# Altium PCB DAC.PcbDoc
Units mil, origin at the board's own origin, x right, y up, seen from the top; angles counter-clockwise.
Board outline 4142.98 x 3908 mil, 2 copper layers (Top Layer, Bottom Layer); 119 components, 77 nets, 441 pads, 85 vias.
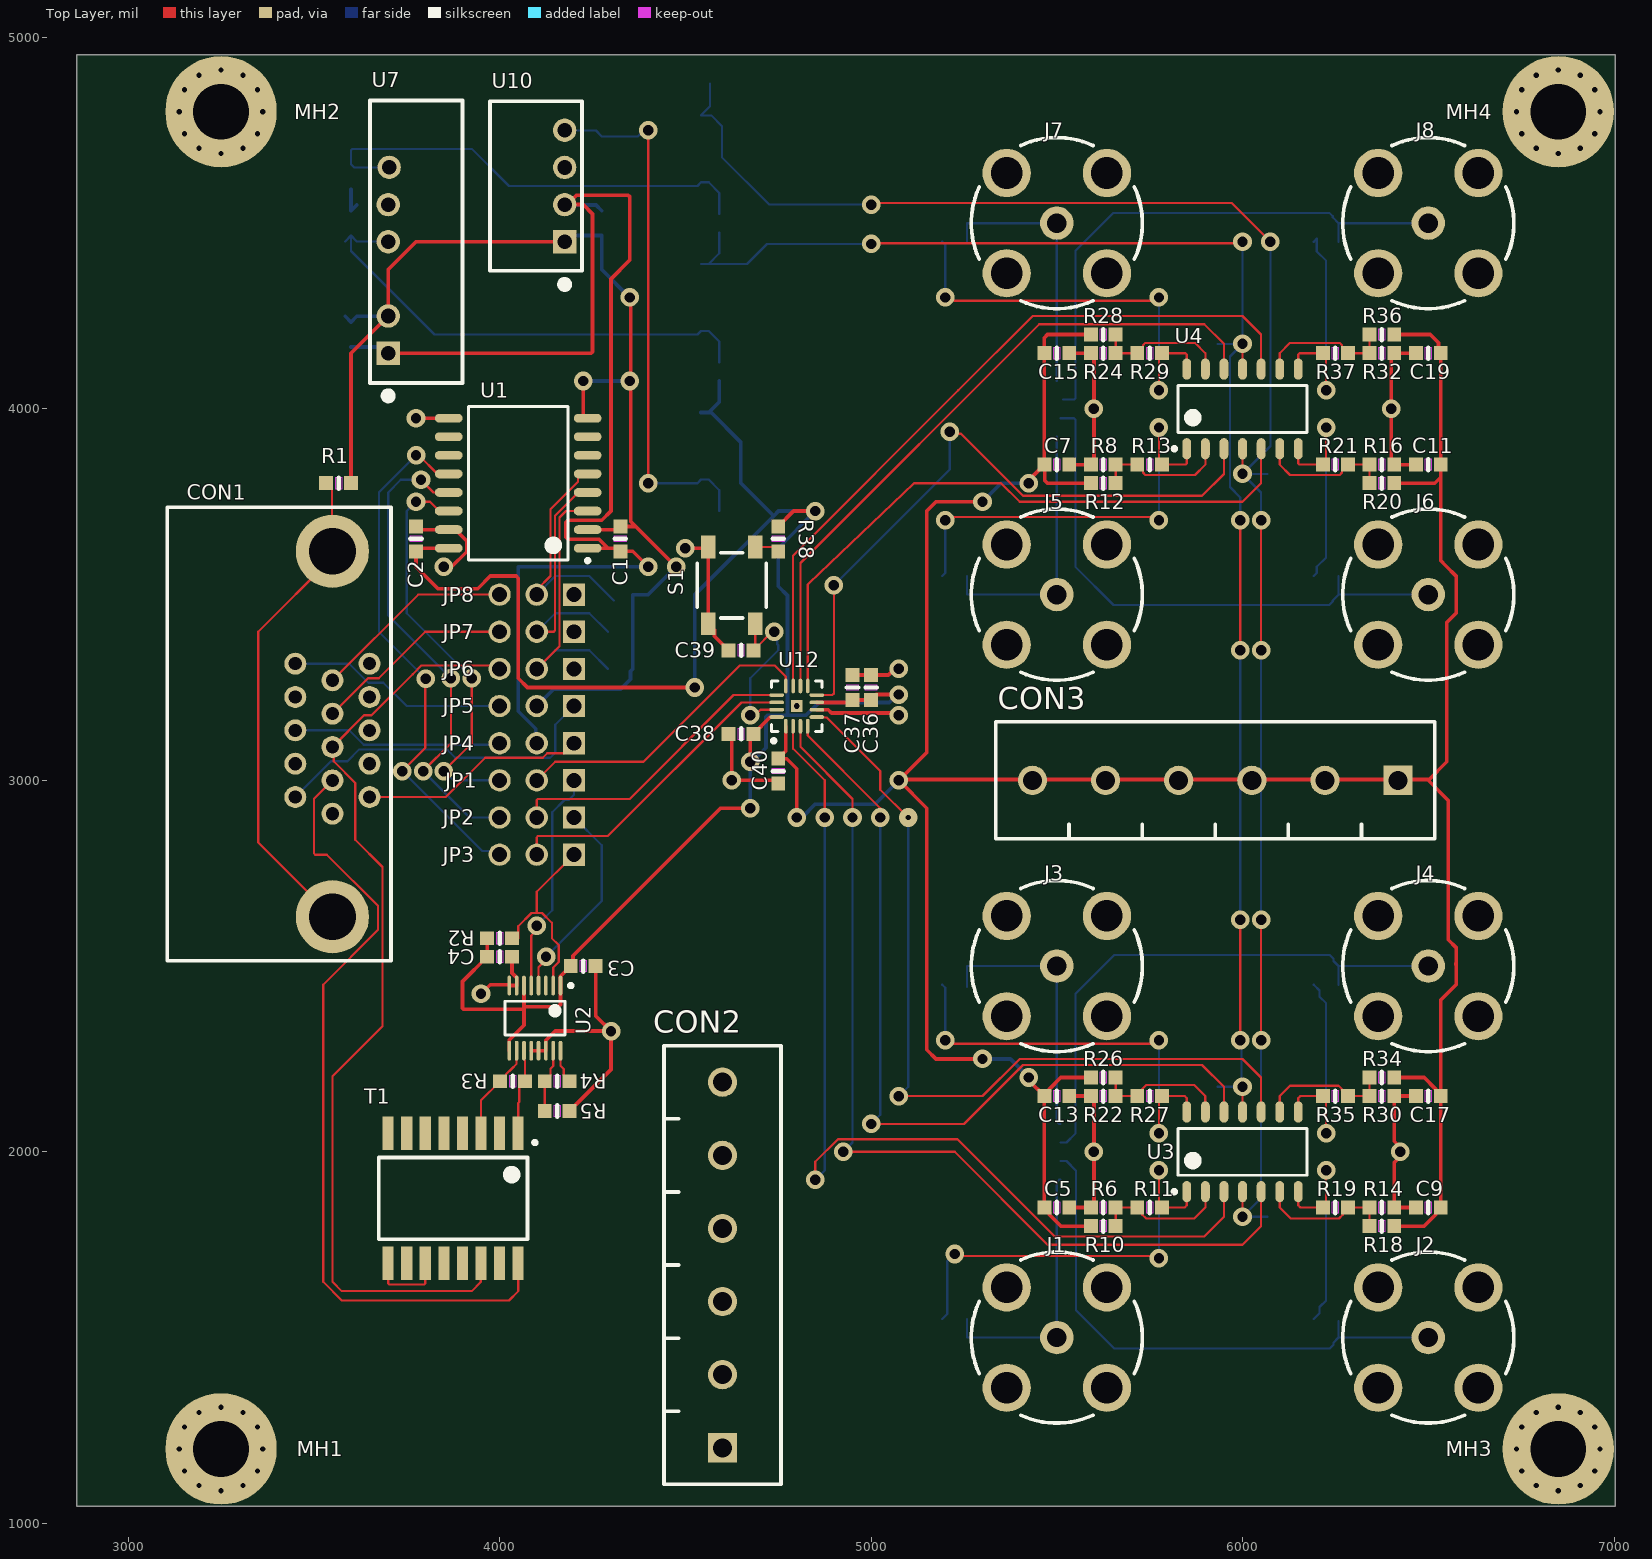
[diagram p0: Top Layer view]
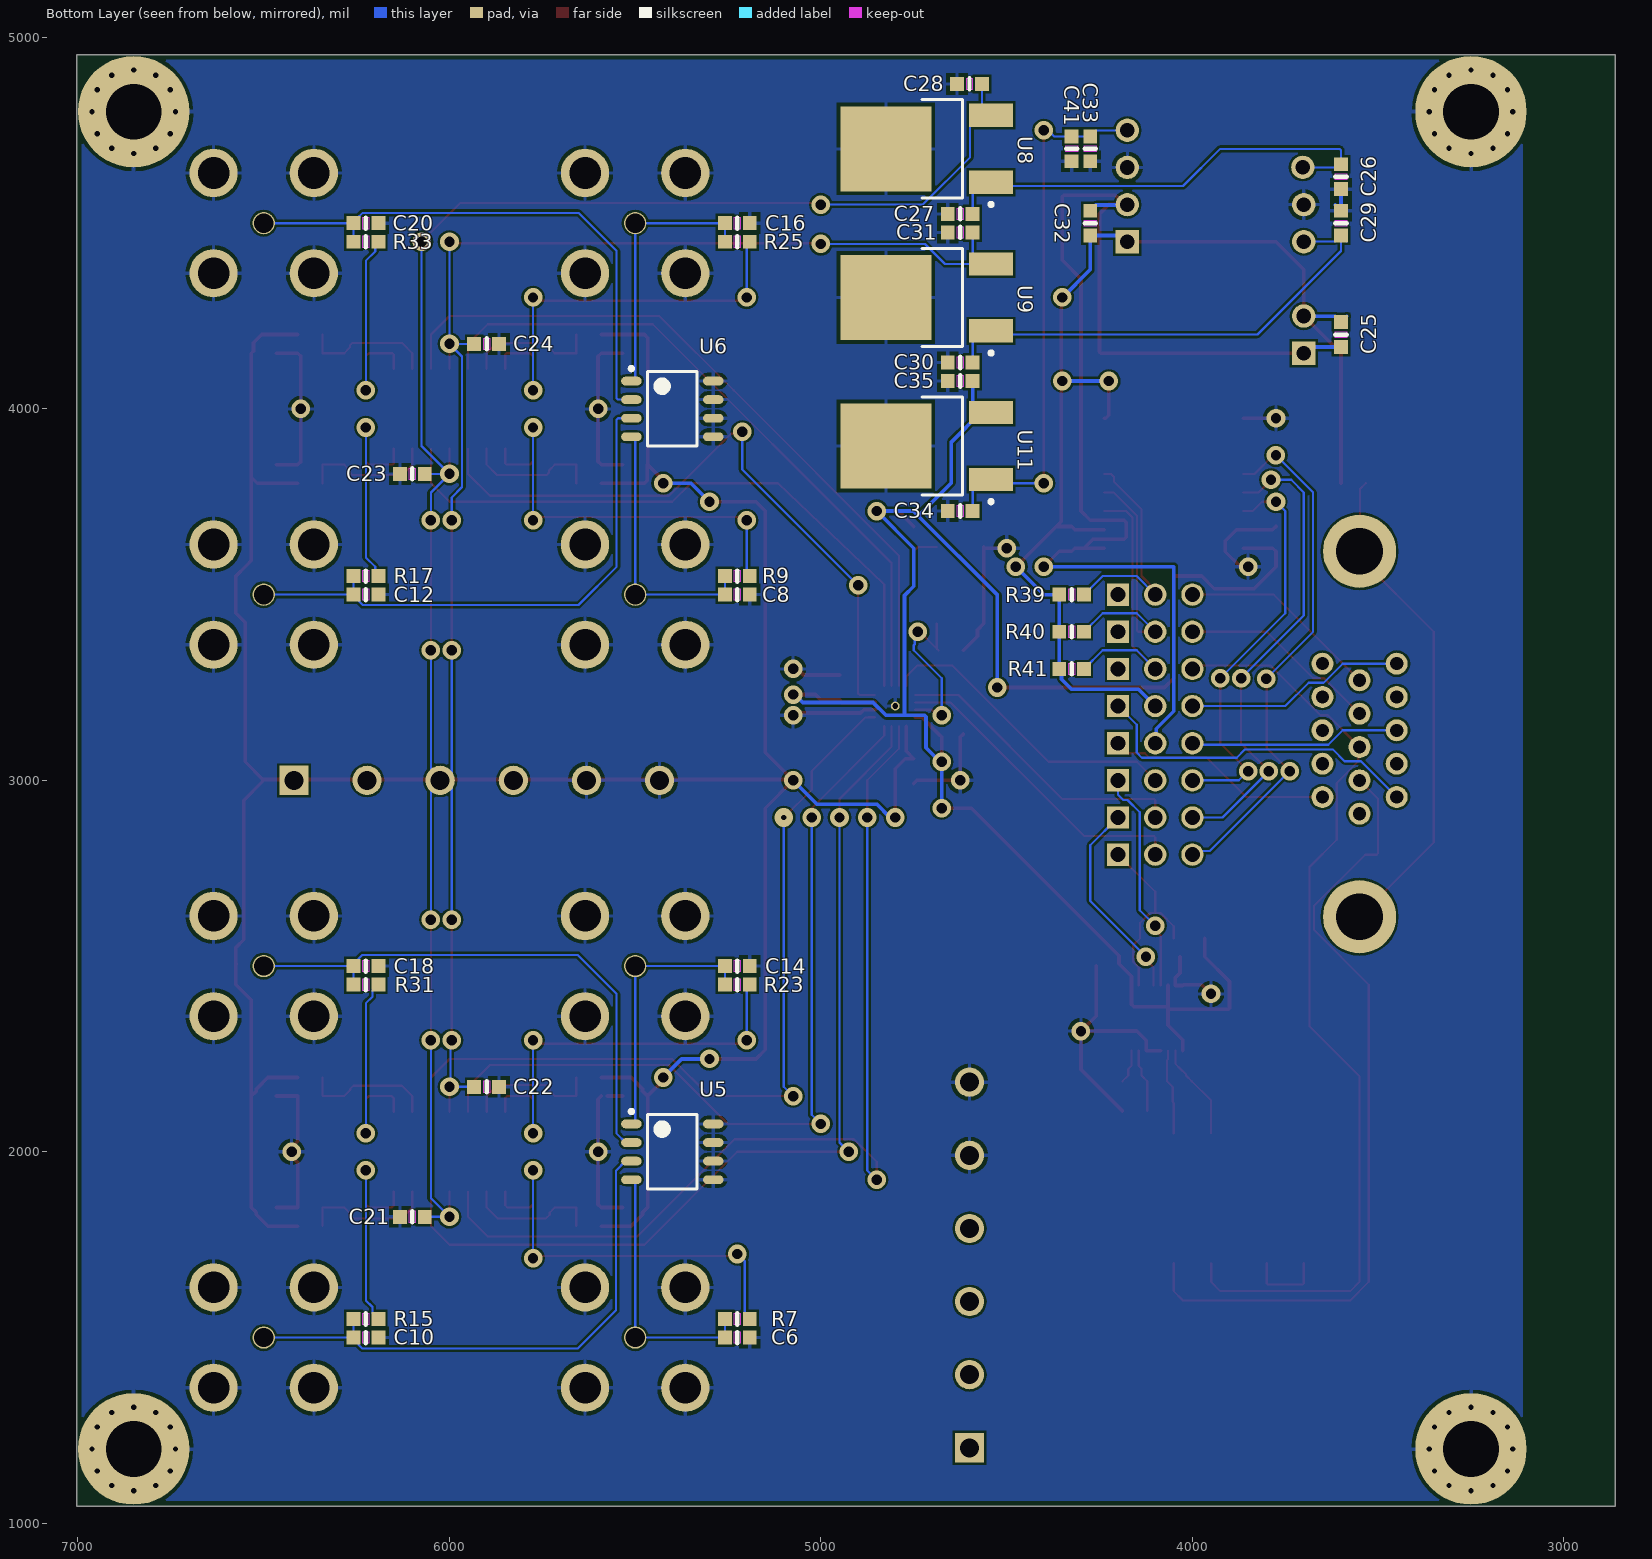
[diagram p1: Bottom Layer view, seen from below]

## Layer stack, top to bottom
Top Solder: solder mask 0.4, Solder Resist, Dk 3.5
Top Layer: signal copper 1.4
Dielectric 1: dielectric 12.6, FR-4, Dk 4.8
Bottom Layer: signal copper 1.4
Bottom Solder: solder mask 0.4, Solder Resist, Dk 3.5

## Board outline
2861.02,1046 7004,1046 7004,4954 2861.02,4954

## Design rules (kind name [scope] priority, off if disabled: settings)
BoardOutlineClearance [All] p1: gap=10 ignorepadtopadclearanceinfootprint=FALSE except(0: Arc-SplitContinuation Track-SplitContinuation SMDPad-SplitContinuation THPad-SplitContinuation Via-SplitContinuation Fill-SplitContinuation Poly-SplitContinuation Region-SplitContinuation Text-SplitContinuation)
Clearance [All] p1: gap=6 ignorepadtopadclearanceinfootprint=FALSE except(0: Arc-Hole Track-Hole SMDPad-Hole THPad-Hole Via-Hole Fill-Hole Poly-Hole Region-Hole Text-Hole)
HoleSize [All] p1: absolutevalues=TRUE maxlimit=250 minlimit=14 maxpercent=80.000 minpercent=20.000
HoleToHoleClearance [All] p1: gap=6 allowstackedmicrovias=TRUE
MinimumSolderMaskSliver [All] p1: minsoldermaskwidth=6
PolygonConnect [All] p1: connectstyle=Relief reliefconductorwidth=10 reliefentries=4 polygonreliefangle="90 Angle" airgapwidth=10
RoomDefinition OutputConnectors [InComponentClass('OutputConnectors')] p1: confinementstyle=ConfineIn formatcopy=TRUE lockcomponents=FALSE outline 0,0 2000,0 2000,1000 0,1000
RoomDefinition InputConnector [InComponentClass('InputConnector')] p2: confinementstyle=ConfineIn formatcopy=TRUE lockcomponents=FALSE outline 0,0 2000,0 2000,1000 0,1000
RoomDefinition DAC [InComponentClass('DAC')] p3: confinementstyle=ConfineIn formatcopy=TRUE lockcomponents=FALSE outline 0,0 2000,0 2000,1000 0,1000
RoomDefinition BackPage [InComponentClass('BackPage')] p4: confinementstyle=ConfineIn formatcopy=TRUE lockcomponents=FALSE outline 0,0 2000,0 2000,1000 0,1000
RoutingVias [All] p1: holewidth=28 width=50 viastyle="Through Hole" minholewidth=28 minwidth=50 maxholewidth=28 maxwidth=50
SilkToSilkClearance [All] p1: silktosilkclearance=6
SilkToSolderMaskClearance [IsPad] p1: minsilkscreentomaskgap=6 clearancetoexposedcopper=TRUE
SolderMaskExpansion [All] p1: expansion=4 istentingtop=FALSE
Width [All] p1: maxlimit=20 minlimit=6 preferedwidth=6 minimp=50.000000 maximp=50.000000 favimp=50.000000
25 further rules are at their usual default settings.

## Classes and differential pairs
component class DAC: C25 C26 C27 C28 C29 C30 C31 C32 C33 C34 C35 C36 C37 C38 C39 C40 C41 R38 S1 U7 U8 U9 U10 U11 U12
component class BackPage: JMP1 JMP2 JMP3 JMP4 JMP5 MH1 MH2 MH3 MH4
component class OutputConnectors: C5 C6 C7 C8 C9 C10 C11 C12 C13 C14 C15 C16 C17 C18 C19 C20 C21 C22 C23 C24 CON2 CON3 J1 J2 J3 J4 J5 J6 J7 J8 R6 R7 R8 R9 R10 R11 R12 R13 R14 R15 R16 R17 R18 R19 R20 R21 R22 R23 R24 R25 R26 R27 R28 R29 R30 R31 R32 R33 R34 R35 R36 R37 U3 U4 U5 U6
component class InputConnector: C1 C2 C3 C4 CON1 JP1 JP2 JP3 JP4 JP5 JP6 JP7 JP8 R1 R2 R3 R4 R5 R39 R40 R41 T1 U1 U2

## Components (designator, comment, footprint, x,y, rotation, side; value= is the part's Value field where it differs from the comment)
C1 "CC0603KRX7R8BB104" 0603-CAP 4325,3650 r270 top value=0.1uF
C2 "CC0603KRX7R8BB104" 0603-CAP 3775,3650 r270 top value=0.1uF
C3 "CC0603KRX7R8BB104" 0603-CAP 4225,2500 r180 top value=0.1uF
C4 "CC0603KRX7R8BB104" 0603-CAP 4000,2525 r180 top value=0.1uF
C5 "CC0603KRX7R7BB184" 0603-CAP 5500,1850 r0 top value=0.18uF
C6 "CC0603KRX7R9BB103" 0603-CAP 5225,1500 r0 bottom value=10nF
C7 "CC0603KRX7R7BB184" 0603-CAP 5500,3850 r0 top value=0.18uF
C8 "CC0603KRX7R9BB103" 0603-CAP 5225,3500 r0 bottom value=10nF
C9 "CC0603KRX7R7BB184" 0603-CAP 6500,1850 r180 top value=0.18uF
C10 "CC0603KRX7R9BB103" 0603-CAP 6225,1500 r0 bottom value=10nF
C11 "CC0603KRX7R7BB184" 0603-CAP 6500,3850 r180 top value=0.18uF
C12 "CC0603KRX7R9BB103" 0603-CAP 6225,3500 r0 bottom value=10nF
C13 "CC0603KRX7R7BB184" 0603-CAP 5500,2150 r0 top value=0.18uF
C14 "CC0603KRX7R9BB103" 0603-CAP 5225,2500 r0 bottom value=10nF
C15 "CC0603KRX7R7BB184" 0603-CAP 5500,4150 r0 top value=0.18uF
C16 "CC0603KRX7R9BB103" 0603-CAP 5225,4500 r0 bottom value=10nF
C17 "CC0603KRX7R7BB184" 0603-CAP 6500,2150 r180 top value=0.18uF
C18 "CC0603KRX7R9BB103" 0603-CAP 6225,2500 r0 bottom value=10nF
C19 "CC0603KRX7R7BB184" 0603-CAP 6500,4150 r180 top value=0.18uF
C20 "CC0603KRX7R9BB103" 0603-CAP 6225,4500 r0 bottom value=10nF
C21 "CC0603KRX7R8BB104" 0603-CAP 6100,1825 r180 bottom value=0.1uF
C22 "CC0603KRX7R8BB104" 0603-CAP 5900,2175 r0 bottom value=0.1uF
C23 "CC0603KRX7R8BB104" 0603-CAP 6100,3825 r180 bottom value=0.1uF
C24 "CC0603KRX7R8BB104" 0603-CAP 5900,4175 r0 bottom value=0.1uF
C25 "CL10A475KA8NQNC" 0603-CAP 3600,4200 r270 bottom value=4.7uF
C26 "CL10B474KO8NNNC" 0603-CAP 3600,4625 r90 bottom value=0.47uF
C27 "CL10A105KP8NNNC" 0603-CAP 4625,4525 r180 bottom value=1uF
C28 "CL10A105KP8NNNC" 0603-CAP 4600,4875 r180 bottom value=1uF
C29 "CL10B474KO8NNNC" 0603-CAP 3600,4500 r90 bottom value=0.47uF
C30 "CL10A105KP8NNNC" 0603-CAP 4625,4125 r0 bottom value=1uF
C31 "CL10A105KP8NNNC" 0603-CAP 4625,4475 r0 bottom value=1uF
C32 "CL10A475KA8NQNC" 0603-CAP 4275,4500 r90 bottom value=4.7uF
C33 "CL10A105KP8NNNC" 0603-CAP 4275,4700 r90 bottom value=1uF
C34 "CL10A105KP8NNNC" 0603-CAP 4625,3725 r180 bottom value=1uF
C35 "CL10A105KP8NNNC" 0603-CAP 4625,4075 r180 bottom value=1uF
C36 "CL10A475KA8NQNC" 0603-CAP 5000,3250 r270 top value=4.7uF
C37 "CC0603KRX7R7BB184" 0603-CAP 4950,3250 r270 top value=0.18uF
C38 "CC0603KRX7R7BB184" 0603-CAP 4650,3125 r0 top value=0.18uF
C39 "CC0603KRX7R7BB184" 0603-CAP 4650,3350 r0 top value=0.18uF
C40 "CC0603KRX7R7BB184" 0603-CAP 4750,3025 r90 top value=0.18uF
C41 "CL10A105KP8NNNC" 0603-CAP 4325,4700 r90 bottom value=1uF
CON1 "ICD15S13E6GX00LF" ICD15S13E6GX00LF 3550,3124.61 r270 top
CON2 "1935200" 1935200 4600,1203.15 r90 top
CON3 "1935200" 1935200 6418.7,3000 r180 top
J1 "0731711900" 0731711900 5500,1500 r0 top
J2 "0731711900" 0731711900 6500,1500 r0 top
J3 "0731711900" 0731711900 5500,2500 r0 top
J4 "0731711900" 0731711900 6500,2500 r0 top
J5 "0731711900" 0731711900 5500,3500 r0 top
J6 "0731711900" 0731711900 6500,3500 r0 top
J7 "0731711900" 0731711900 5500,4500 r0 top
J8 "0731711900" 0731711900 6500,4500 r0 top
JP1 "TSW-103-07-F-S" PIN_HEADER_1X3 4100,3000 r180 top
JP2 "TSW-103-07-F-S" PIN_HEADER_1X3 4100,2900 r180 top
JP3 "TSW-103-07-F-S" PIN_HEADER_1X3 4100,2800 r180 top
JP4 "TSW-103-07-F-S" PIN_HEADER_1X3 4100,3100 r180 top
JP5 "TSW-103-07-F-S" PIN_HEADER_1X3 4100,3200 r180 top
JP6 "TSW-103-07-F-S" PIN_HEADER_1X3 4100,3300 r180 top
JP7 "TSW-103-07-F-S" PIN_HEADER_1X3 4100,3400 r180 top
JP8 "TSW-103-07-F-S" PIN_HEADER_1X3 4100,3500 r180 top
MH1 "MOUNT_HOLE" MOUNTING_HOLE 3250,1200 r0 top
MH2 "MOUNT_HOLE" MOUNTING_HOLE 3250,4800 r0 top
MH3 "MOUNT_HOLE" MOUNTING_HOLE 6850,1200 r0 top
MH4 "MOUNT_HOLE" MOUNTING_HOLE 6850,4800 r0 top
R1 "Resistor" 0603-RES 3566.54,3800 r0 top value=DNP
R2 "RC0603FR-072K8L" 0603-RES 4000,2575 r180 top value=2.8K
R3 "RC0603FR-07120RL" 0603-RES 4035,2190 r0 top value=120
R4 "RC0603FR-072K8L" 0603-RES 4155,2190 r0 top value=2.8K
R5 "RC0603FR-071K2L" 0603-RES 4155,2110 r180 top value=1.2K
R6 "ERJ-PB3B1002V" 0603-RES 5625,1850 r0 top value=10K
R7 "RC0603FR-07120RL" 0603-RES 5225,1550 r0 bottom value=120
R8 "ERJ-PB3B1002V" 0603-RES 5625,3850 r0 top value=10K
R9 "RC0603FR-07120RL" 0603-RES 5225,3550 r0 bottom value=120
R10 "ERJ-PB3B7501V" 0603-RES 5625,1800 r0 top value=7.5K
R11 "ERJ-PB3B3002V" 0603-RES 5750,1850 r0 top value=30K
R12 "ERJ-PB3B7501V" 0603-RES 5625,3800 r0 top value=7.5K
R13 "ERJ-PB3B3002V" 0603-RES 5750,3850 r0 top value=30K
R14 "ERJ-PB3B1002V" 0603-RES 6375,1850 r180 top value=10K
R15 "RC0603FR-07120RL" 0603-RES 6225,1550 r0 bottom value=120
R16 "ERJ-PB3B1002V" 0603-RES 6375,3850 r180 top value=10K
R17 "RC0603FR-07120RL" 0603-RES 6225,3550 r0 bottom value=120
R18 "ERJ-PB3B7501V" 0603-RES 6375,1800 r180 top value=7.5K
R19 "ERJ-PB3B3002V" 0603-RES 6250,1850 r180 top value=30K
R20 "ERJ-PB3B7501V" 0603-RES 6375,3800 r180 top value=7.5K
R21 "ERJ-PB3B3002V" 0603-RES 6250,3850 r180 top value=30K
R22 "ERJ-PB3B1002V" 0603-RES 5625,2150 r0 top value=10K
R23 "RC0603FR-07120RL" 0603-RES 5225,2450 r0 bottom value=120
R24 "ERJ-PB3B1002V" 0603-RES 5625,4150 r0 top value=10K
R25 "RC0603FR-07120RL" 0603-RES 5225,4450 r0 bottom value=120
R26 "ERJ-PB3B7501V" 0603-RES 5625,2200 r0 top value=7.5K
R27 "ERJ-PB3B3002V" 0603-RES 5750,2150 r0 top value=30K
R28 "ERJ-PB3B7501V" 0603-RES 5625,4200 r0 top value=7.5K
R29 "ERJ-PB3B3002V" 0603-RES 5750,4150 r0 top value=30K
R30 "ERJ-PB3B1002V" 0603-RES 6375,2150 r180 top value=10K
R31 "RC0603FR-07120RL" 0603-RES 6225,2450 r0 bottom value=120
R32 "ERJ-PB3B1002V" 0603-RES 6375,4150 r180 top value=10K
R33 "RC0603FR-07120RL" 0603-RES 6225,4450 r0 bottom value=120
R34 "ERJ-PB3B7501V" 0603-RES 6375,2200 r180 top value=7.5K
R35 "ERJ-PB3B3002V" 0603-RES 6250,2150 r180 top value=30K
R36 "ERJ-PB3B7501V" 0603-RES 6375,4200 r180 top value=7.5K
R37 "ERJ-PB3B3002V" 0603-RES 6250,4150 r180 top value=30K
R38 "ERJ-PB3B1002V" 0603-RES 4750,3650 r90 top value=10K
R39 "ERJ-PB3B1002V" 0603-RES 4325,3500 r180 bottom value=10K
R40 "ERJ-PB3B1002V" 0603-RES 4325,3400 r180 bottom value=10K
R41 "ERJ-PB3B1002V" 0603-RES 4325,3300 r180 bottom value=10K
S1 "PTS 647 SK38 SMTR2 LFS" PTS647SK38SMTR2LFSCT-ND 4625,3525 r270 top
T1 "HX1188NLT" HX1188NLT 3875,1875 r180 top
U1 "ADUM130E1BRWZ" SOIC127P1030X265-16N 4050,3800 r180 top
U2 "LTC6820IMS#TRPBF" TSSOP50P490X110-16N 4095,2360 r270 top
U3 "OPA4192IDR" SOIC127P600X175-14N 6000,2000 r90 top
U4 "OPA4192IDR" SOIC127P600X175-14N 6000,4000 r90 top
U5 "SMDB12CTR" SOIC127P600X180-8N 5400,2000 r180 bottom
U6 "SMDB12CTR" SOIC127P600X180-8N 5400,4000 r180 bottom
U7 "PDME1-S5-D15-S" PDME1-S5-D15-S 3700,4150 r90 top
U8 "MC78M12BDTRKG" DPAK229P991X238-3N 4683.66,4700 r0 bottom
U9 "MC79M12CDTRKG" DPAK229P991X238-3N 4683.66,4300 r0 bottom
U10 "PDSE1-S5-S9-S" PDSE1-S5-S9-S 4175,4600 r90 top
U11 "MC78M05CDTRKG" DPAK229P991X238-3N 4683.66,3900 r0 bottom
U12 "DAC60508MCRTET" ? 4800,3200 r90 top

## Footprints (in the part's own frame and the unit in brackets; to place one, negate y for a bottom-side part, rotate by r counter-clockwise, add the part's x,y. Pads: shape width x height; smd on the part's side, far side on the other; paste and mask are expansions set on the pad)
0603-CAP [mm]
  rect 0.95x0.95 smd: 1(-0.85,0) 2(0.85,0)
  Top Layer keep-out region: -0.2,0.4 0.2,0.4 0.2,-0.4 -0.2,-0.4
  silkscreen extent 0,-0.38 0,0.38, body extent -0.77,-0.45 0.83,0.45, height 0.78
0603-RES [mm]
  rect 0.95x0.95 smd: 1(-0.85,0) 2(0.85,0)
  Top Layer keep-out region: -0.2,0.4 0.2,0.4 0.2,-0.4 -0.2,-0.4
  silkscreen extent 0,-0.38 0,0.38, body extent -0.8,-0.4 0.8,0.4, height 0.44
1935200 [mm]
  rect 2x2 hole 1.3: 1(0,0)
  round 2 hole 1.3: 2(5,0) 3(10,0) 4(15,0) 5(20,0) 6(25,0)
  silkscreen extent -2.5,-4 27.5,4, body extent -2.9,-4 27.5,5, height 11.5
0731711900 [mil] "CONN BNC JACK STR 75 OHM PCB"
  round 90 / inner round 60 / far side round 60 hole 52: 1(0,0)
  round 130 hole 85: 2(-135,-135)
  round 130 hole 85 paste+0: 2(-135,135) 2(135,-135) 2(135,135)
  silkscreen extent -230,-230 230,230, body extent -217,-217 217,217, height 657
DPAK229P991X238-3N [mm] "D-PAK, 3-Pads, Body 6.21x6.73mm (max), IPC Medium Density"
  rect 3x1.6 smd: 1(-3.59,2.29) 3(-3.59,-2.29)
  rect 6.2x5.8 smd: 4(3.59,0)
  silkscreen extent -3.72,-3.36 1.12,3.92, body extent -4.35,-3.38 5.56,3.37, height 2.38
HX1188NLT [mil] "XFRMR MAGNETIC 1PORT 1:1 10/100"
  rect 30x90 smd: 1(-175,-175) 2(-125,-175) 3(-75,-175) 4(-25,-175) 5(25,-175) 6(75,-175) 7(125,-175) 8(175,-175) 9(175,175) 10(125,175) 11(75,175) 12(25,175) 13(-25,175) 14(-75,175) 15(-125,175) 16(-175,175)
  silkscreen extent -225,-155 200,110, body extent -250,-181 250,189, height 235
ICD15S13E6GX00LF [mm] "CONN DSUB HD RCPT 15POS R/A SLDR"
  round 1.5 hole 0.9: 1(4.305,2.54) 2(2.025,2.54) 3(-0.255,2.54) 4(-2.535,2.54) 5(-4.815,2.54) 6(5.445,0) 7(3.165,0) 8(0.885,0) 9(-1.395,0) 10(-3.675,0) 11(4.305,-2.54) 12(2.025,-2.54) 13(-0.255,-2.54) 14(-2.535,-2.54) 15(-4.815,-2.54)
  round 5 hole 3.2: SH1(12.495,0) SH2(-12.495,0)
  silkscreen extent -15.5,-11.3 15.5,4, body extent -15.5,-17.5 15.5,4.08, height 12.65
MOUNTING_HOLE [mil]
  round 30 hole 14: 1(-112.5,0) 1(-98.43,-59.06) 1(-98.43,59.06) 1(-59.06,-98.43) 1(-59.06,98.43) 1(0,-112.5) 1(0,112.5) 1(59.06,-98.43) 1(59.06,98.43) 1(98.43,-59.06) 1(98.43,59.06) 1(112.5,0)
  round 300 hole 150: 1(0,0)
PDME1-S5-D15-S [mm]
  rect 1.6x1.6 hole 1: 1(0,0)
  round 1.6 hole 1: 2(2.54,0) 4(7.62,0) 5(10.16,0) 6(12.704,-0.065)
  silkscreen extent -3.17,-5.08 17.28,1.24, body extent -2.23,-4.92 17.42,1.08, height 10.16
PDSE1-S5-S9-S [mm]
  rect 1.6x1.6 hole 1: 1(-3.81,0)
  round 1.6 hole 1: 2(-1.27,0) 3(1.27,0) 4(3.81,0)
  silkscreen extent -6.98,-1.19 5.8,5.1, body extent -5.8,-0.85 5.8,5.15, height 10.16
PIN_HEADER_1X3 [mil]
  rect 60x60 hole 40.16: 1(-100,0)
  round 60 hole 40.16: 2(0,0) 3(100,0)
  body extent -150,-50 150,50, height 500
PTS647SK38SMTR2LFSCT-ND [mm]
  rect 1.55x1 smd: 1(-2.625,1.6) 2(2.625,1.6) 3(-2.625,-1.6) 4(2.625,-1.6)
  silkscreen extent -2.24,-2.36 2.24,2.36, body extent -3.75,-2.25 3.75,2.25, height 4.2
SOIC127P600X175-14N [mm] "SOIC, 14-Leads, Body 8.65x3.90mm, Pitch 1.27mm, IPC Medium Density"
  oval 1.45x0.6 smd: 1(-2.725,3.81) 2(-2.725,2.54) 3(-2.725,1.27) 4(-2.725,0) 5(-2.725,-1.27) 6(-2.725,-2.54) 7(-2.725,-3.81) 8(2.725,-3.81) 9(2.725,-2.54) 10(2.725,-1.27) 11(2.725,0) 12(2.725,1.27) 13(2.725,2.54) 14(2.725,3.81)
  silkscreen extent -2.85,-4.4 1.6,4.78, body extent -3,-4.4 3,4.4, height 1.75
SOIC127P600X180-8N [mm] "SOIC, 8-Leads, Body 4.92x3.95mm, Pitch 1.27mm, IPC Medium Density"
  oval 1.4x0.6 smd: 1(-2.8,1.905) 2(-2.8,0.635) 3(-2.8,-0.635) 4(-2.8,-1.905) 5(2.8,-1.905) 6(2.8,-0.635) 7(2.8,0.635) 8(2.8,1.905)
  silkscreen extent -2.93,-2.55 1.7,2.88, body extent -3,-2.55 3,2.55, height 1.8
SOIC127P1030X265-16N [mm] "SOIC, 16-Leads, Body 10.30x7.50mm, Pitch 1.27mm, IPC Medium Density"
  oval 1.9x0.6 smd: 1(-4.75,4.445) 2(-4.75,3.175) 3(-4.75,1.905) 4(-4.75,0.635) 5(-4.75,-0.635) 6(-4.75,-1.905) 7(-4.75,-3.175) 8(-4.75,-4.445) 9(4.75,-4.445) 10(4.75,-3.175) 11(4.75,-1.905) 12(4.75,-0.635) 13(4.75,0.635) 14(4.75,1.905) 15(4.75,3.175) 16(4.75,4.445)
  silkscreen extent -4.88,-5.25 3.4,5.42, body extent -5.16,-5.25 5.16,5.25, height 2.65
TSSOP50P490X110-16N [mm] "TSSOP, 16-Leads, Body 4.00x3.00mm, Pitch 0.50mm, IPC Medium Density"
  oval 1.35x0.254 smd mask+0.045: 1(-2.225,1.75) 2(-2.225,1.25) 3(-2.225,0.75) 4(-2.225,0.25) 5(-2.225,-0.25) 6(-2.225,-0.75) 7(-2.225,-1.25) 8(-2.225,-1.75) 9(2.225,-1.75) 10(2.225,-1.25) 11(2.225,-0.75) 12(2.225,-0.25) 13(2.225,0.25) 14(2.225,0.75) 15(2.225,1.25) 16(2.225,1.75)
  silkscreen extent -2.35,-2.05 1.15,2.58, body extent -2.45,-2.05 2.45,2.05, height 1.1
? [mm] "QFN, 16-Leads, Body 3.00x3.00mm, Pitch 0.50mm, Thermal Pad 0.80x0.80mm, IPC Medium Density"
  oval 1x0.25 smd: 1(-1.375,0.75) 2(-1.375,0.25) 3(-1.375,-0.25) 4(-1.375,-0.75) 9(1.375,-0.75) 10(1.375,-0.25) 11(1.375,0.25) 12(1.375,0.75)
  oval 0.25x1 smd: 5(-0.75,-1.375) 6(-0.25,-1.375) 7(0.25,-1.375) 8(0.75,-1.375) 13(0.75,1.375) 14(0.25,1.375) 15(-0.25,1.375) 16(-0.75,1.375)
  rect 0.8x0.8 smd: 17(0,0)
  round 0.6 hole 0.4: 17(0,0)
  silkscreen extent -2.5,-1.72 1.72,1.73, body extent -1.58,-1.58 1.58,1.58, height 0.8

## Part data
C1 C2 C3 C4 C21 C22 C23 C24: library part "Capacitor 0.1uF", "0.1µF ±10% 25V Ceramic Capacitor X7R 0603 (1608 Metric)", Supplier Part Number 1=311-1341-1-ND, Supplier 1=Digi-Key
C5 C7 C9 C11 C13 C15 C17 C19 C37 C38 C39 C40: library part "Capacitor 0.18uF", "0.18µF ±10% 16V Ceramic Capacitor X7R 0603 (1608 Metric)", Supplier Part Number 1=311-4066-1-ND, Supplier 1=Digi-Key
C6 C8 C10 C12 C14 C16 C18 C20: library part "Capacitor 10nF", "10000pF ±10% 50V Ceramic Capacitor X7R 0603 (1608 Metric)", Supplier Part Number 1=311-1085-1-ND, Supplier 1=Digi-Key
C25 C32 C36: library part "Capacitor 4.7uF", "4.7µF ±10% 25V Ceramic Capacitor X5R 0603 (1608 Metric)", Supplier Part Number 1=1276-1900-1-ND, Supplier 1=Digi-Key
C26 C29: library part "Capacitor .47uF", "0.47µF ±10% 16V Ceramic Capacitor X7R 0603 (1608 Metric)", Supplier Part Number 1=1276-1062-1-ND, Supplier 1=Digi-Key
C27 C28 C30 C31 C33 C34 C35 C41: library part "Capacitor 1uF", "1µF ±10% 10V Ceramic Capacitor X5R 0603 (1608 Metric)", Supplier Part Number 1=1276-1182-1-ND, Supplier 1=Digi-Key
CON1: "15 Position D-Sub, High Density Receptacle, Female Sockets Connector", Supplier Part Number 1=609-2801-ND, Supplier 1=Digi-Key
CON2 CON3: "6 Position Wire to Board Terminal Block Horizontal with Board 0.197\" (5.00mm) Through Hole", Supplier Part Number 1=277-1581-ND, Supplier 1=Digi-Key
J1 J2 J3 J4 J5 J6 J7 J8: "CONN BNC JACK STR 75 OHM PCB", Supplier Part Number 1=WM5517-ND, Supplier 1=Digi-Key
JP1 JP2 JP3 JP4 JP5 JP6 JP7 JP8: "Connector Header Through Hole 3 position 0.100\" (2.54mm)", Supplier Part Number 1=SAM8995-ND, Supplier 1=Digi-Key
MH1 MH2 MH3 MH4: "MOUNTING HOLE"
R1: "DNP", Supplier 1=Digi-Key
R2 R4: library part "Resistor 2.8K", "2.8 kOhms ±1% 0.1W, 1/10W Chip Resistor 0603 (1608 Metric) Moisture Resistant Thick Film", Supplier Part Number 1=311-2.80KHRCT-ND, Supplier 1=Digi-Key
R3 R7 R9 R15 R17 R23 R25 R31 R33: library part "Resistor 120", "120 Ohms ±1% 0.1W, 1/10W Chip Resistor 0603 (1608 Metric) Moisture Resistant Thick Film", Supplier Part Number 1=311-120HRCT-ND, Supplier 1=Digi-Key
R5: library part "Resistor 1.2K", "1.2 kOhms ±1% 0.1W, 1/10W Chip Resistor 0603 (1608 Metric) Moisture Resistant Thick Film", Supplier Part Number 1=311-1.20KHRCT-ND, Supplier 1=Digi-Key
R6 R8 R14 R16 R22 R24 R30 R32 R38 R39 R40 R41: library part "Resistor 10K", "10 kOhms ±0.1% 0.2W, 1/5W Chip Resistor 0603 (1608 Metric) Automotive AEC-Q200, Pulse Withstanding Thick Film", Supplier Part Number 1=P20086CT-ND, Supplier 1=Digi-Key
R10 R12 R18 R20 R26 R28 R34 R36: library part "Resistor 7.5K", "7.5 kOhms ±0.1% 0.2W, 1/5W Chip Resistor 0603 (1608 Metric) Automotive AEC-Q200, Pulse Withstanding Thick Film", Supplier Part Number 1=P20072CT-ND, Supplier 1=Digi-Key
R11 R13 R19 R21 R27 R29 R35 R37: library part "Resistor 30K", "30 kOhms ±0.1% 0.2W, 1/5W Chip Resistor 0603 (1608 Metric) Automotive AEC-Q200, Pulse Withstanding Thick Film", Supplier Part Number 1=P20138CT-ND, Supplier 1=Digi-Key
S1: "Tactile Switch SPST-NO Top Actuated Surface Mount", Supplier Part Number 1=PTS647SK38SMTR2LFSCT-ND, Supplier 1=Digi-Key
T1: "XFRMR MAGNETIC 1PORT 1:1 10/100", Supplier Part Number 1=553-1536-1-ND, Supplier 1=Digi-Key
U1: "General Purpose Digital Isolator 3750Vrms 3 Channel 150Mbps 75kV/µs CMTI 16-SOIC (0.295\", 7.50mm Width)", Supplier Part Number 1=ADUM130E1BRWZ-ND, Supplier 1=Digi-Key
U2: "IC INTERFACE SPECIALIZED 16MSOP", Supplier Part Number 1=LTC6820IMS#TRPBFCT-ND, Supplier 1=Digi-Key
U3 U4: "General Purpose Amplifier 4 Circuit Rail-to-Rail 14-SOIC", Supplier Part Number 1=296-43159-1-ND, Supplier 1=Digi-Key
U5 U6: library part SMDA12C-4TR, "19V Clamp 1A (8/20µs) Ipp Tvs Diode Surface Mount 8-SO", Supplier Part Number 1=1655-1650-1-ND, Supplier 1=Digi-Key
U7: "Isolated Module DC DC Converter 2 Output 15V -15V   34mA, 34mA 4.5V - 5.5V Input", Supplier Part Number 1=102-6323-ND, Supplier 1=Digi-Key
U8: "+12 Linear Voltage Regulator IC  1 Output  500mA DPAK", Supplier Part Number 1=MC78M12BDTRKGOSCT-ND, Supplier 1=Digi-Key
U9: "-12 Linear Voltage Regulator IC  1 Output  500mA DPAK", Supplier Part Number 1=MC79M12CDTRKGOSCT-ND, Supplier 1=Digi-Key
U10: "Isolated Module DC DC Converter 1 Output 9V    111mA 4.5V - 5.5V Input", Supplier Part Number 1=102-6292-ND, Supplier 1=Digi-Key
U11: "+5V Linear Voltage Regulator IC  1 Output  500mA DPAK", Supplier Part Number 1=MC78M05CDTRKGOSCT-ND, Supplier 1=Digi-Key
U12: "12 Bit Digital to Analog Converter 8 16-WQFN (3x3)", Supplier Part Number 1=296-52288-1-ND, Supplier 1=Digi-Key

## Via types
v1: diameter 50, hole 28, Top Layer to Bottom Layer, 84 vias
v2: diameter 50, hole 14, Top Layer to Bottom Layer, tented both sides, 1 vias

## Nets (pads, with @x,y where several pads share a name; then routed paths per layer and width w, separated by ;. In a path a pad name is that pad's centre, name@x,y a point inside that pad or via, vN(x,y) a via of type N, cw(c..) or ccw(c..) an arc to the next point about the centre after c; other vN are vias at no path point)
+5V: C2.2 C3.2 C4.2 C35.2 C36.2 C37.2 C38.2 R2.2 R38.2 U1.16 U2.1 U2.6 U2.9 U11.3 U12.7 U12.16 | length 5557.8
  Top Layer w10: U1.16 3783.46,3625 C2.2 3775,3575 3834,3516 3941,3516 3975,3550 4044.02,3550 4050,3544.02 4050,3275 4075,3250 v1(4525,3250) ; R2.2 C4.2 3900,2458.46 3900,2387 3903.51,2383.49 4065.47,2383.49 ; U2.9 4026.1,2301.1 4065.47,2340.47 4065.47,2383.49 ; U2.6 4065.47,2390.53 ; v1(4675,2925) 4594.83,2925 4197.67,2527.84 4197.67,2506.13 4163.9,2472.36 U2.1 4163.9,2396.39 4158.04,2390.53 4065.47,2390.53 ; v1(4675,3050) 4675,3116.54 C38.2 4728.2,3169.74 4745.13,3169.74 U12.16 ; R38.2 4791.54,3725 v1(4850,3725) ; U12.7 4943.31,3209.84 C37.2 C36.2 5014.46,3231 v1(5075,3231) ; 4065.47,2383.49 4065.47,2390.53
  Bottom Layer w10: v1(4525,3250) 4525,3498.95 4738.03,3711.97 ; U11.3 4563.04,3990.16 4569.88,3990.16 4648.8,3911.24 4648.8,3801.2 4738.03,3711.97 ; U11.3@4566.46,3993.58 4591.54,4018.65 C35.2 ; v1(4675,2925) v1(4675,3050) 4679.43,3050 4716.93,3087.5 4716.93,3171.49 4720.45,3175 4775,3175 ; v1(5075,3231) 5070.3,3231 5049.14,3209.84 4859.84,3209.84 4825,3175 4775,3175 ; 4738.03,3711.97 4751.05,3725 v1(4850,3725) 4750,3625 4750,3522.46 4775,3497.46 4775,3175
+9V: C33.2 C34.2 C41.2 U10.4 U11.1 | length 1452.1
  Top Layer w6: v1(4400,4750) 4400.27,4749.73 4400.27,3800.27 v1(4400.54,3800)
  Bottom Layer w6: U10.4 4175.83,4749.17 4259.3,4749.17 C33.2 C41.2 4371.56,4733.46 4388.09,4750 v1(4400,4750) ; v1(4400.54,3800) 4532.48,3800 U11.1 4563.04,3809.84 4591.54,3781.35 C34.2
+12V: C21.2 C23.2 C28.2 U3.4 U4.4 U8.3 | length 4787
  Top Layer w6: v1(5000,4550) 5004,4554 5971,4554 v1(6075,4450) ; v1(6000,1825) U3.4 ; v1(6000,3825) U4.4 ; v1(6050,2300) v1(6050,2625) ; v1(6050,3350) v1(6050,3700)
  Bottom Layer w6: C28.2 4566.54,4814.37 U8.3 4569.88,4790.16 4598.38,4761.66 4598.38,4677.67 4726.05,4550 v1(5000,4550) ; v1(6050,2300) 6050,1875 v1(6000,1825) C21.2 ; v1(6050,2625) v1(6050,3350) ; v1(6050,3700) 6050,3775 v1(6000,3825) ; C23.2 v1(6000,3825) ; v1(6075,4450) 6075,3900 v1(6000,3825)
+15V: C26.2 C27.2 U7.6 U8.1 | length 1250.7
  Bottom Layer w6: U7.6 3608.29,4650.18 C26.2 3600,4696.49 3603.51,4700 3925,4700 4025,4600 4532.48,4600 U8.1 4563.04,4609.84 4591.54,4581.35 C27.2
-12V: C22.2 C24.2 C31.1 U3.11 U4.11 U9.3 | length 4150.8
  Top Layer w6: v1(5000,4444) 5002,4446 5996,4446 v1(6000,4450) ; v1(5994,2300) v1(5994,2625) ; v1(5994,3350) v1(5994,3700) ; U3.11 v1(6000,2175) ; U4.11 v1(6000,4175)
  Bottom Layer w6: U9.3 U9.3@4563.04,4390.16 ; C31.1 4591.54,4418.65 U9.3@4563.04,4390.16 ; v1(5000,4444) 4720.05,4444 4666.21,4390.16 U9.3@4563.04,4390.16 ; C22.2 v1(6000,2175) 5997,2178 5997,2297 v1(5994,2300) ; C24.2 v1(6000,4175) ; v1(5994,2625) v1(5994,3350) ; v1(5994,3700) 5994,3761.49 5966,3789.49 5966,4141 v1(6000,4175) ; v1(6000,4450) v1(6000,4175)
-15V: C29.1 C30.1 U7.4 U9.1 | length 1328.7
  Top Layer w6: U7.4@3699.17,4450.83 U7.4
  Bottom Layer w6: C29.1@3584.3,4450.83 C29.1 ; U7.4 3699.17,4450.83 3615.7,4450.83 C29.1 ; C30.1 4591.54,4181.35 4563.04,4209.84 U9.1 4532.48,4200 3825,4200 3600,4425 C29.1
AMDC_5V: C1.2 C25.2 C32.2 JP4.2 U1.1 U7.1 U10.2 | length 3598.6
  Top Layer w10: U7.1 4246.49,4150 4250,4153.51 4250,4525 4225,4550 U10.2@4182.27,4550 ; U10.2 U10.2@4182.27,4550 ; U1.1 4292.03,3625 ; v1(4400,3575) 4358.46,3616.54 C1.2 4316.54,3625 4292.03,3625 ; U10.2@4182.27,4550 4207.27,4575 4346.49,4575 4350,4571.49 4350,4400 4300,4350 4300,3725 4275,3700 4183.79,3700 4177.93,3694.14 4177.93,3655.17 4183.79,3649.31 4267.72,3649.31 4292.03,3625
  Bottom Layer w10: C25.2 3683.46,4166.54 U7.1 ; JP4.2 4097.24,3102.76 4097.24,3139.14 4052.93,3183.45 4050,3186.38 4050,3575 v1(4400,3575) ; U10.2 4175.83,4549.17 4259.3,4549.17 C32.2
AMDC_GND: C1.1 C25.1 C32.1 JP5.2 R1.2 R39.1 R40.1 R41.1 U1.2 U1.8 U7.2 U10.1 | length 3358.2
  Top Layer w10: R1.2 3600,4150 U7.2 3700,4375 3775,4450 U10.1 ; v1(4225,4075) 4225,3983.14 4233.14,3975 U1.8 ; U1.2 4316.54,3675 C1.1 4366.54,3683.46 ; v1(4350,4300) 4352.7,4297.3 4352.7,3697.3 4366.54,3683.46 ; v1(4475,3575) 4366.54,3683.46
  Bottom Layer w10: C25.1@3584.3,4249.17 C25.1 3615.7,4249.17 3699.17,4249.17 U7.2 ; JP5.2 4145.43,3245.43 4325.6,3245.43 4352.33,3272.16 4352.33,3293.87 R41.1 R40.1 R39.1 4400,3500 v1(4475,3575) ; U10.1 4191.54,4466.54 C32.1 4275,4375 v1(4350,4300) ; v1(4225,4075) v1(4350,4075)
ANLG-0: C6.2 J1.1 R7.2 U5.4 | length 723.1
  Bottom Layer w6: R7.2 C6.2 J1.1 5500,1918.71 5506.29,1925 U5.4
ANLG-1: C10.2 J2.1 R15.2 U5.3 | length 1478.9
  Bottom Layer w6: U5.3 5525.98,1975 5551.8,1949.19 5551.8,1573.21 5654.7,1470.3 6234.48,1470.3 6244.76,1480.59 6244.76,1486.3 C10.2 ; R15.2@6258.46,1544.14 C10.2 ; J2.1 C10.2
ANLG-2: C14.2 J3.1 R23.2 U5.1 | length 728.8
  Bottom Layer w6: R23.2@5258.46,2444.29 R23.2 C14.2 J3.1 5500,2081.29 5506.29,2075 U5.1
ANLG-3: C18.2 J4.1 R31.2 U5.2 | length 1484.7
  Bottom Layer w6: U5.2 5525.98,2025 5550,2049.02 5550,2425 5654.7,2529.7 6234.48,2529.7 6244.76,2519.41 6244.76,2513.7 C18.2 ; R31.2 C18.2 ; J4.1 C18.2
ANLG-4: C8.2 J5.1 R9.2 U6.4 | length 716.5
  Bottom Layer w6: R9.2 C8.2 J5.1 U6.4@5500,3925
ANLG-5: C12.2 J6.1 R17.2 U6.3 | length 1493.4
  Bottom Layer w6: U6.3 5546.49,3975 5550,3971.49 5550,3575 5652.7,3472.3 6233.65,3472.3 6242.76,3481.41 6242.76,3484.3 C12.2 ; R17.2 C12.2 ; J6.1 C12.2
ANLG-6: C16.2 J7.1 R25.2 U6.1 | length 716.5
  Bottom Layer w6: R25.2 C16.2 J7.1 U6.1@5500,4075
ANLG-7: C20.2 J8.1 R33.2 U6.2 | length 1486
  Bottom Layer w6: U6.2@5517.64,4025 5546.49,4025 5550,4028.51 5550,4425 5652.7,4527.7 6233.65,4527.7 6242.76,4518.59 6242.76,4515.7 C20.2 ; R33.2 C20.2 ; J8.1 C20.2
CS: JP1.2 U12.12 | length 836.1
  Top Layer w6: JP1.2 4150,3050 4387.5,3050 4646.5,3309 4741,3309 4770.47,3279.53 U12.12
CS_ISO: JP1.1 U2.5 | length 606.8
  Top Layer w6: U2.5 4085.16,2582.25 4100,2597.09 v1(4100,2609)
  Bottom Layer w6: v1(4100,2609) 4141.53,2650.53 4141.53,2914.26 4174.64,2947.36 4186.36,2947.36 4200,2961 JP1.1
DAC-0: U3.3 U12.2 | length 2637.6
  Top Layer w6: U12.2 4790.16,3084.84 4875,3000 v1(4875,2900) ; v1(4850,1925) 4850,1973.08 4910.92,2034 5232.41,2034 5494.11,1772.3 5897.3,1772.3 5950,1825 U3.3
  Bottom Layer w6: v1(4850,1925) 4875,1950 v1(4875,2900)
DAC-1: U3.5 U12.3 | length 2556.3
  Top Layer w6: U12.3 4809.84,3090.16 4950,2950 v1(4950,2900) ; v1(4925,2000) 5225,2000 5475,1750 6000,1750 6050,1800 U3.5
  Bottom Layer w6: v1(4925,2000) 4950,2025 v1(4950,2900)
DAC-2: U3.12 U12.4 | length 2270.2
  Top Layer w6: U12.4 4829.53,3120.47 5025,2925 v1(5025,2900) ; v1(5000,2075) 5250,2075 5409,2234 5891,2234 5950,2175 U3.12
  Bottom Layer w6: v1(5000,2075) 5025,2100 v1(5025,2900)
DAC-3: U3.10 U12.5 | length 2277.4
  Top Layer w6: U12.5 4854.87,3169.74 4872.35,3169.74 4872.87,3169.22 4880.78,3169.22 5025,3025 5025,2975 v2(5100,2900) ; v1(5075,2150) 5300,2150 5400,2250 6000,2250 6050,2200 U3.10
  Bottom Layer w6: v1(5075,2150) 5100,2175 v2(5100,2900)
DAC-4: U4.3 U12.8 | length 1783.2
  Top Layer w6: U12.8 4895.47,3229.53 4900,3234.05 v1(4900,3525) ; v1(5211.54,3938.46) 5217.03,3932.97 5242.03,3932.97 5409,3766 5891,3766 5950,3825 U4.3
  Bottom Layer w6: v1(4900,3525) 5211.54,3836.54 v1(5211.54,3938.46)
DAC-5: U4.5 U12.9 | length 1736.8
  Top Layer w6: U12.9 4829.53,3527.04 4833.04,3530.56 5115.61,3800 5350,3800 5400,3750 6000,3750 6050,3800 U4.5
DAC-6: U4.12 U12.10 | length 1826.7
  Top Layer w6: U12.10 4809.84,3584.84 5452.7,4227.7 5897.3,4227.7 5950,4175 U4.12
DAC-7: U4.10 U12.11 | length 1991.4
  Top Layer w6: U12.11 4790.16,3605.21 5234.95,4050 5434.95,4250 6000,4250 6050,4200 U4.10
GND: C2.1 C3.1 C4.1 C5.2 C6.1 C7.2 C8.1 C9.2 C10.1 C11.2 C12.1 C13.2 C14.1 C15.2 C16.1 C17.2 C18.1 C19.2 C20.1 C21.1 C22.1 C23.1 C24.1 C26.1 C27.1 C28.1 C29.2 C30.2 C31.2 C33.1 C34.1 C35.1 C36.1 C37.1 C38.1 C39.1 C40.1 C41.1 CON2.5 CON2.6 CON3.5 CON3.6 J1.2 J2.2 J3.2 J4.2 J5.2 J6.2 J7.2 J8.2 MH1.1 MH2.1 MH3.1 MH4.1 R5.1 R6.1 R8.1 R14.1 R16.1 R22.1 R24.1 R30.1 R32.1 S1.3 S1.4 U1.9 U1.15 U2.7 U2.8 U2.12 U2.13 U2.14 U5.5 U5.6 U5.7 U5.8 U6.5 U6.6 U6.7 U6.8 U7.5 U8.4 U9.4 U10.3 U11.4 U12.6 U12.17 | length 3989.1
  Top Layer w10: U7.5@3699.17,4549.17 U7.5 ; C2.1 3783.46,3675 U1.15 3880.68,3675 3911.39,3644.29 3911.39,3615.55 3870.84,3575 v1(3850,3575) ; v1(3775,3975) U1.9 ; v1(3950,2425) 3975,2450 4024.25,2450 4024.25,2449.45 U2.8 U2.7 4045.79,2469.17 4033.46,2481.5 C4.1 ; U2.12 U2.13 U2.14 4124.53,2299.53 4150,2325 v1(4300,2325) ; R5.1 4300,2221.54 v1(4300,2325) ; C3.1 4258.46,2366.54 v1(4300,2325) ; v1(4500.04,3625.09) 4558.75,3625.09 S1.3 S1.4 4578.69,3404.97 4578.69,3387.84 C39.1 ; C38.1 4625,3116.54 v1(4625,3000) 4741.54,3000 C40.1 ; U12.6 4884.84,3190.16 4893.78,3181.22 5068.78,3181.22 v1(5075,3175) ; C37.1 C36.1 5046.56,3283.46 5063.09,3300 v1(5075,3300) ; C5.2 R6.1 5600,1858.46 v1(5600,2000) 5600,2141.54 R22.1 ; C13.2 R22.1@5575,2150 ; C7.2 R8.1 5600,3858.46 v1(5600,4000) 5600,4141.54 R24.1 C15.2 ; C9.2 R14.1 6408.46,1971.56 6425,1988.09 v1(6425,2000) 6425,2011.91 6408.46,2028.44 R30.1 C17.2 ; C11.2 R16.1 6400,3858.46 v1(6400,4000) 6400,4141.54 R32.1 C19.2
  Bottom Layer w10: C26.1 C29.2 C29.2@3615.7,4549.17 ; U7.5@3699.17,4549.17 U7.5
INV_GND_1: CON1.7 T1.16 | length 2152.5
  Top Layer w6: CON1.7 3500,2950 3500,2803.51 3503.51,2800 3534.6,2800 3672.51,2662.08 3672.51,2597.51 3525,2450 3525,1650 3575,1600 4025,1600 4050,1625 T1.16
INV_GND_2: CON1.15 JP5.3 | length 597.3
  Bottom Layer w6: CON1.15 3595.51,3314.17 3646.75,3262.94 3687.06,3262.94 3750,3200 JP5.3
INV_PWM_1: CON1.1 JP4.1 | length 610
  Top Layer w6: CON1.1 3855.12,2955.12 3961,3061 4116.15,3061 4128.15,3073 4173,3073 JP4.1
INV_PWM_2: CON1.2
INV_PWM_3: CON1.3
INV_PWM_4: CON1.4
INV_PWM_5: CON1.5
INV_PWM_6: CON1.6
INV_STS_A: CON1.8 JP6.3 T1.14 | length 2566.4
  Top Layer w6: T1.14 3949.51,1699.51 3949.51,1649.51 3925,1625 3575,1625 3550,1650 3550,2203.6 3684.51,2338.12 3684.51,2766.72 3611.47,2839.76 3611.47,2993.01 3553.25,3051.24 3553.25,3086.51 CON1.8 3635.24,3175 3655.08,3175 3766,3285.92 3789.08,3309 3991,3309 JP6.3
INV_STS_A_ISO: JP1.3 U1.14 | length 1097.6
  Top Layer w6: v1(3775,3750) 3812.4,3750 3837.4,3725 U1.14 ; v1(3850,3025) 3925,3100 v1(3925,3275)
  Bottom Layer w6: v1(3775,3750) 3750,3725 3750,3450 v1(3925,3275) ; v1(3850,3025) 3875,3000 JP1.3
INV_STS_B: CON1.9 JP7.3 | length 541.3
  Top Layer w6: CON1.9 3645.47,3275 3675,3275 3800,3400 JP7.3
INV_STS_B_ISO: JP2.3 U1.13 | length 1300
  Top Layer w6: v1(3788.31,3809) 3822.31,3775 U1.13 ; v1(3794,3025) 3869,3100 v1(3869,3275)
  Bottom Layer w6: v1(3788.31,3809) 3734,3809 3700,3775 3700,3444 v1(3869,3275) ; v1(3794,3025) 3919,2900 JP2.3
INV_STS_C: CON1.10 JP8.3 | length 545.6
  Top Layer w6: CON1.10 3780.71,3500 JP8.3
INV_STS_C_ISO: JP3.3 U1.12 | length 1434.2
  Top Layer w6: v1(3738,3025) 3800,3087 3800,3271.84 v1(3801.58,3273.42) ; v1(3775.04,3875.09) 3782.55,3875.09 3832.63,3825 U1.12
  Bottom Layer w6: v1(3738,3025) 3953.08,2809.92 3990.08,2809.92 JP3.3 ; v1(3775.04,3875.09) 3675,3775.04 3675,3400 3800,3275 v1(3801.58,3273.42)
INV_STS_D: CON1.11 JP5.1 | length 913.9
  Bottom Layer w6: CON1.11 3546.12,3051.24 3590.27,3051.24 3622.44,3083.41 3858.09,3083.41 3880.5,3061 4136,3061 4150,3075 4150,3150 JP5.1
MOSI_ISO: JP3.1 R2.1 U2.2 | length 529.6
  Top Layer w6: R2.1@4050,2575 4050,2607.08 4085.92,2643 4100,2643 ; U2.2 4144.21,2496.13 4159,2510.92 4159,2556.7 4140.7,2575 4140.7,2616.39 4114.08,2643 4100,2643 ; JP3.1 4100,2700 4100,2643
NetC39_2: C39.2 S1.2 U12.15 | length 481.1
  Top Layer w6: v1(4675,3175) 4686.91,3175 4702.06,3190.16 U12.15 ; C39.2 C39.2@4687.99,3354.53 ; S1.2 C39.2@4687.99,3354.53 ; v1(4739,3400) 4733.46,3400 C39.2@4687.99,3354.53
  Bottom Layer w6: v1(4675,3175) 4675,3275 4750,3350 4750,3363.55 4747.42,3366.13 4747.42,3391.58 v1(4739,3400)
NetJP6_2: JP6.2 R41.2 U1.3 | length 749.1
  Top Layer w6: JP6.2 4161.15,3361.15 4161.15,3366.12 4161,3366.27 4161,3707.49 4178.51,3725 U1.3
  Bottom Layer w6: JP6.2 4150,3350 4241.54,3350 R41.2
NetJP7_2: JP7.2 R40.2 U1.4 | length 706.3
  Top Layer w6: JP7.2 4145.49,3400 4149,3403.51 4149,3712.58 4211.42,3775 U1.4
  Bottom Layer w6: JP7.2 4150,3450 4241.54,3450 R40.2
NetJP8_2: JP8.2 R39.2 U1.5 | length 647.3
  Top Layer w6: JP8.2 4100,3513 4137,3550 4137,3730.01 4211.18,3804.19 4211.18,3816.86 4219.32,3825 U1.5
  Bottom Layer w6: JP8.2 4150,3550 4241.54,3550 R39.2 R39.2@4307.24,3484.3
NetR3_1: R3.1 T1.3 U2.10 | length 262.3
  Top Layer w6: T1.3 3950,2138.46 R3.1 4017.24,2205.7 4017.24,2208.59 4031.8,2223.15 4032.11,2223.15 4045.79,2236.83 U2.10
NetR3_2: R3.2 T1.1 U2.11 | length 231.3
  Top Layer w6: T1.1 4050,2131.77 4052.76,2134.53 4052.76,2174.3 R3.2 4068.46,2246.75 4065.47,2249.74 U2.11
NetR4_1: R4.1 R5.2 U2.15 | length 171.8
  Top Layer w6: R5.2 R4.1 4137.24,2205.7 4137.24,2223.85 4144.21,2230.83 U2.15
NetR4_2: R4.2 U2.16 | length 92.6
  Top Layer w6: U2.16 4163.9,2231.77 4172.76,2222.91 4172.76,2205.7 R4.2
NetR6_2: R6.2 R10.2 R11.1 U3.2 | length 362.2
  Top Layer w6: R10.2 R6.2 R11.1 5730.24,1836.3 5730.24,1830.59 5740.52,1820.3 5870.3,1820.3 5900,1850 U3.2
NetR7_1: R7.1 R11.2 U3.1 | length 1188.7
  Top Layer w6: v1(5225,1725) 5230.5,1719.5 5769.5,1719.5 v1(5775,1714) ; v1(5775,1950) 5775,1858.46 R11.2 5844.14,1850 5850,1855.86 U3.1
  Bottom Layer w6: R7.1 5205.24,1563.7 5205.24,1705.24 v1(5225,1725) ; v1(5775,1714) v1(5775,1950)
NetR8_2: R8.2 R12.2 R13.1 U4.2 | length 360.6
  Top Layer w6: R12.2 R8.2 R13.1 5732.24,3834.3 5732.24,3828.51 5738.45,3822.3 5872.3,3822.3 5900,3850 U4.2
NetR9_1: R9.1 R13.2 U4.1 | length 1196.7
  Top Layer w6: v1(5200,3700) 5208.42,3708.42 5224.93,3708.42 5225.51,3709 5754.09,3709 5763.09,3700 v1(5775,3700) ; v1(5775,3950) 5775,3858.46 R13.2 5846.49,3850 5850,3853.51 U4.1
  Bottom Layer w6: R9.1 5200,3558.46 v1(5200,3700) ; v1(5775,3700) v1(5775,3950)
NetR14_2: R14.2 R18.2 R19.1 U3.6 | length 362.2
  Top Layer w6: U3.6 6100,1850 6129.7,1820.3 6259.48,1820.3 6269.76,1830.59 6269.76,1836.3 R19.1 R14.2 R18.2
NetR15_1: R15.1 R19.2 U3.7 | length 623.2
  Top Layer w6: U3.7 6150,1855.86 6155.86,1850 R19.2 6225,1858.46 v1(6225,1950)
  Bottom Layer w6: R15.1 6207.24,1565.7 6207.24,1582.24 6225,1600 v1(6225,1950)
NetR16_2: R16.2 R20.2 R21.1 U4.6 | length 360.6
  Top Layer w6: U4.6 6100,3850 6127.7,3822.3 6261.55,3822.3 6267.76,3828.51 6267.76,3834.3 R21.1 R16.2 R20.2
NetR17_1: R17.1 R21.2 U4.7 | length 624.6
  Top Layer w6: U4.7 6150,3853.51 6153.51,3850 R21.2 6225,3858.46 v1(6225,3950)
  Bottom Layer w6: R17.1 6200,3558.46 6200,3575 6225,3600 v1(6225,3950)
NetR22_2: R22.2 R26.2 R27.1 U3.13 | length 362.2
  Top Layer w6: R26.2 R22.2 R27.1 5730.24,2163.7 5730.24,2169.41 5740.52,2179.7 5870.3,2179.7 5899.43,2150.57 5899.43,2107.85 U3.13
NetR23_1: R23.1 R27.2 U3.14 | length 1191.4
  Top Layer w6: v1(5200,2300) 5209,2291 5755.73,2291 5764.73,2300 v1(5775,2300) ; v1(5775,2050) 5775,2141.54 R27.2 ; R27.2@5787.33,2150 5844.14,2150 5850,2144.14 U3.14
  Bottom Layer w6: R23.1 5200,2441.54 v1(5200,2300) ; v1(5775,2050) v1(5775,2300)
NetR24_2: R24.2 R28.2 R29.1 U4.13 | length 360.6
  Top Layer w6: R28.2 R24.2 R29.1 5732.24,4165.7 5732.24,4171.49 5738.45,4177.7 5872.3,4177.7 5900,4150 U4.13
NetR25_1: R25.1 R29.2 U4.14 | length 1196.7
  Top Layer w6: v1(5200,4300) 5208.42,4291.58 5224.93,4291.58 5225.51,4291 5759,4291 5768,4300 v1(5775,4300) ; v1(5775,4050) 5775,4141.54 R29.2 5846.49,4150 5850,4146.49 U4.14
  Bottom Layer w6: R25.1 5200,4441.54 v1(5200,4300) ; v1(5775,4050) v1(5775,4300)
NetR30_2: R30.2 R34.2 R35.1 U3.9 | length 358.9
  Top Layer w6: U3.9 6100,2150 6127.7,2177.7 6258.65,2177.7 6266.87,2169.48 6266.87,2166.59 R35.1 R30.2 R34.2
NetR31_1: R31.1 R35.2 U3.8 | length 623.2
  Top Layer w6: U3.8 6150,2144.14 6155.86,2150 R35.2 6225,2141.54 v1(6225,2050)
  Bottom Layer w6: R31.1 6207.24,2434.3 6207.24,2417.76 6225,2400 v1(6225,2050)
NetR32_2: R32.2 R36.2 R37.1 U4.9 | length 360.6
  Top Layer w6: U4.9 6100,4150 6127.7,4177.7 6261.55,4177.7 6267.76,4171.49 6267.76,4165.7 R37.1 R32.2 R36.2
NetR33_1: R33.1 R37.2 U4.8 | length 641.5
  Top Layer w6: U4.8 6150,4146.49 6153.51,4150 R37.2 6225,4141.54 v1(6225,4050)
  Bottom Layer w6: R33.1 6200,4458.46 6200,4423.65 6225,4398.65 v1(6225,4050)
NetR38_1: R38.1 S1.1 | length 66.9
  Top Layer w6: S1.1 4738.19,3628.35 R38.1
NetT1_9: T1.9 T1.11 | length 210.9
  Top Layer w6: T1.9 3700,1646 3703.51,1642.49 3796.49,1642.49 3800,1646 T1.11
PSGND: CON1.14
SCK_ISO: JP2.1 U2.4 | length 553.9
  Top Layer w6: U2.4 4104.84,2497.07 4125,2517.23 v1(4125,2525)
  Bottom Layer w6: v1(4125,2525) 4275,2675 4275,2825 JP2.1
SCLK: JP2.2 U12.13 | length 809.6
  Top Layer w6: JP2.2 4100,2946.49 4103.51,2950 4350,2950 4629.53,3229.53 U12.13
SDI: JP3.2 U12.14 | length 842.9
  Top Layer w6: JP3.2 4100,2846.49 4103.51,2850 4291.41,2850 4651.25,3209.84 U12.14
SH_CON: CON1.SH1 CON1.SH2 R1.1 | length 1340
  Top Layer w6: R1.1 3548.77,3784.3 3548.77,3617.76 CON1.SH2 3550,3600 3350,3400 3350,2832.68 CON1.SH1
SPI1_OUT_N: CON1.13 JP4.3 | length 567.6
  Bottom Layer w6: CON1.13 3595.51,3134.65 3634.04,3096.12 3996.12,3096.12 JP4.3
SPI1_OUT_P: CON1.12
VREF: C5.1 C7.1 C9.1 C11.1 C13.1 C15.1 C17.1 C19.1 C40.2 R10.1 R12.1 R18.1 R20.1 R26.1 R28.1 R34.1 R36.1 U12.1 | length 8512.2
  Top Layer w10: U12.1 4770.47,3078.94 C40.2 4772.88,3058.46 4800,3031.34 v1(4800,2900) ; v1@5075,3002.49 6502.49,3002.49 ; v1(5300,2250) 5175,2250 5150,2275 5150,2925 v1(5075,3000) 5150,3075 5150,3725 5175,3750 v1(5300,3750) ; v1(5425,2200) 5425,2191.54 C13.1 ; v1(5425,3800) 5425,3808.46 C7.1 ; R10.1 5510.82,1800 5480.24,1830.59 5480.24,1836.3 C5.1 C13.1 ; R26.1 5510.82,2200 5480.24,2169.41 5480.24,2163.7 C13.1 ; R12.1 5475,3800 5467.83,3807.17 5467.83,3848.7 C7.1 ; R28.1 5475,4200 5466.54,4191.54 C15.1 C7.1 ; R18.1 6489.18,1800 6519.76,1830.59 6519.76,1836.3 C9.1 C17.1 ; R34.1 6489.18,2200 6519.76,2169.41 6519.76,2163.7 C17.1 ; R20.1 6517.35,3800 6533.46,3816.11 ; R36.1 6505.17,4200 6527.33,4177.84 6527.33,4156.13 C19.1 C11.1 6533.46,3816.11 ; 6502.49,3002.49 6550,3050 6550,3425 6575,3450 6575,3550 6547.07,3577.93 6533.46,3591.54 6533.46,3816.11 ; 6502.49,3002.49 6502.49,2997.51 6554,2946 6554,2609.41 6554,2608.06 6554,2571 6575,2550 6575,2508.14 6574.48,2507.62 cw(c6519,2500) 6575,2500 6575,2450 6533.46,2408.46 C17.1
  Bottom Layer w10: v1(4800,2900) 4814,2900 4850,2936 5011,2936 v1(5075,3000) ; v1(5300,2250) 5375,2250 v1(5425,2200) ; v1(5300,3750) 5350,3800 v1(5425,3800)
pads on no net: CON2.1 CON2.2 CON2.3 CON2.4 CON3.1 CON3.2 CON3.3 CON3.4 JP6.1 JP7.1 JP8.1 T1.2 T1.4 T1.5 T1.6 T1.7 T1.8 T1.10 T1.12 T1.13 T1.15 U1.6 U1.7 U1.10 U1.11 U2.3

## Polygon pours and split planes (outlines as drawn)
GND on Bottom Layer "GND_L02_P000" (solid, pour order 0): 3100.43,4950.38 3100.43,1050.38 7000.43,1050.38 7000.43,4950.38